# Altium PCB ftdi_pcb.PcbDoc
Units mil, origin at the board's own origin, x right, y up, seen from the top; angles counter-clockwise.
Board outline 1450 x 715 mil, 2 copper layers (Top Layer, Bottom Layer); 12 components, 10 nets, 50 pads, 19 vias.
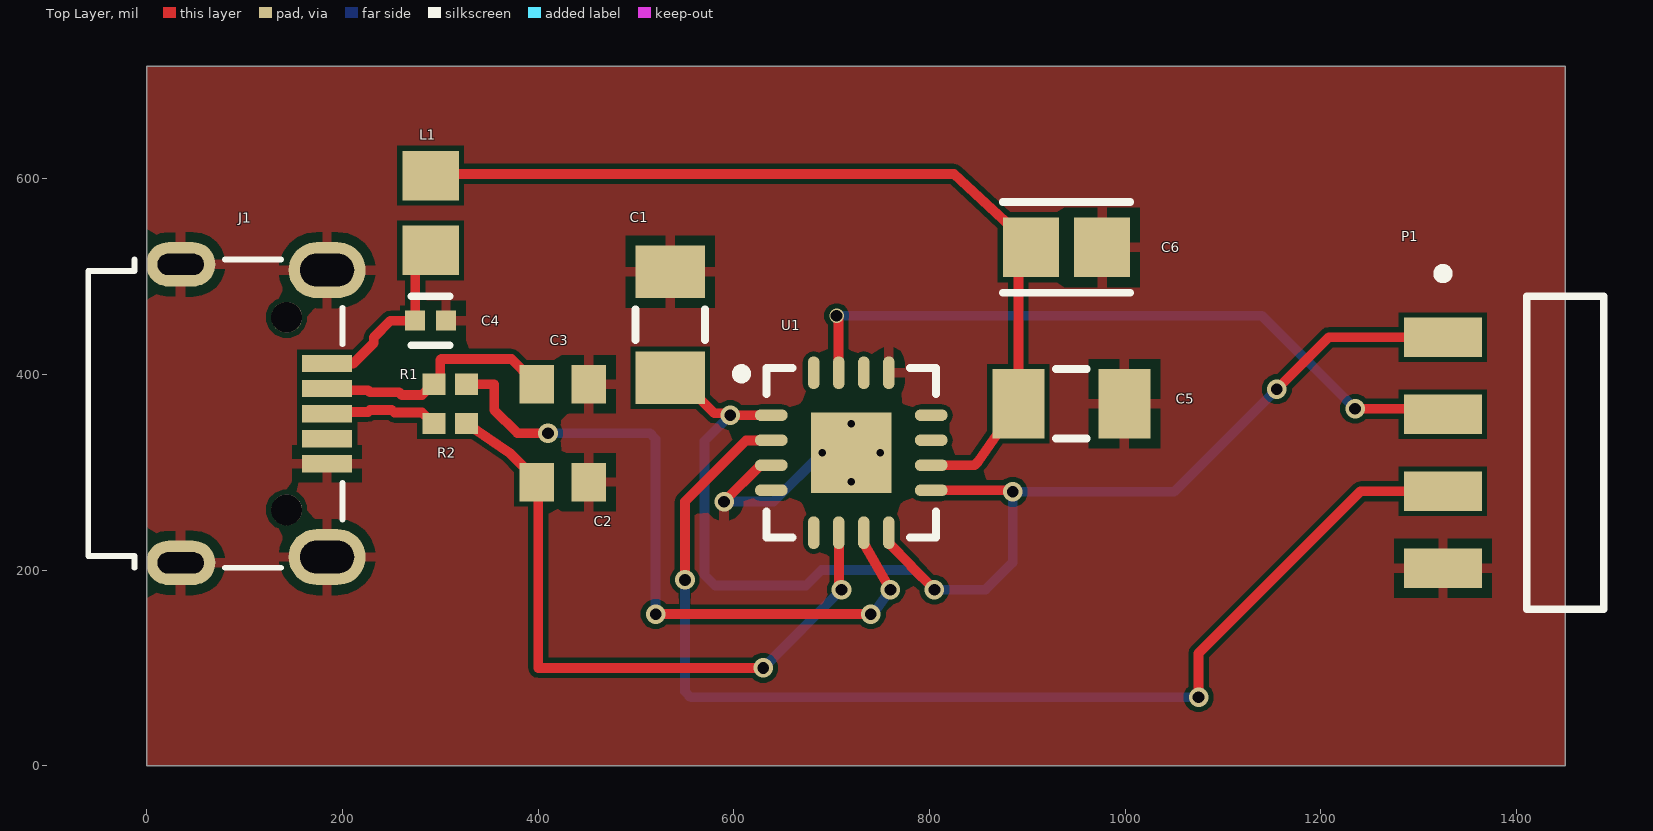
[diagram p0: Top Layer view]
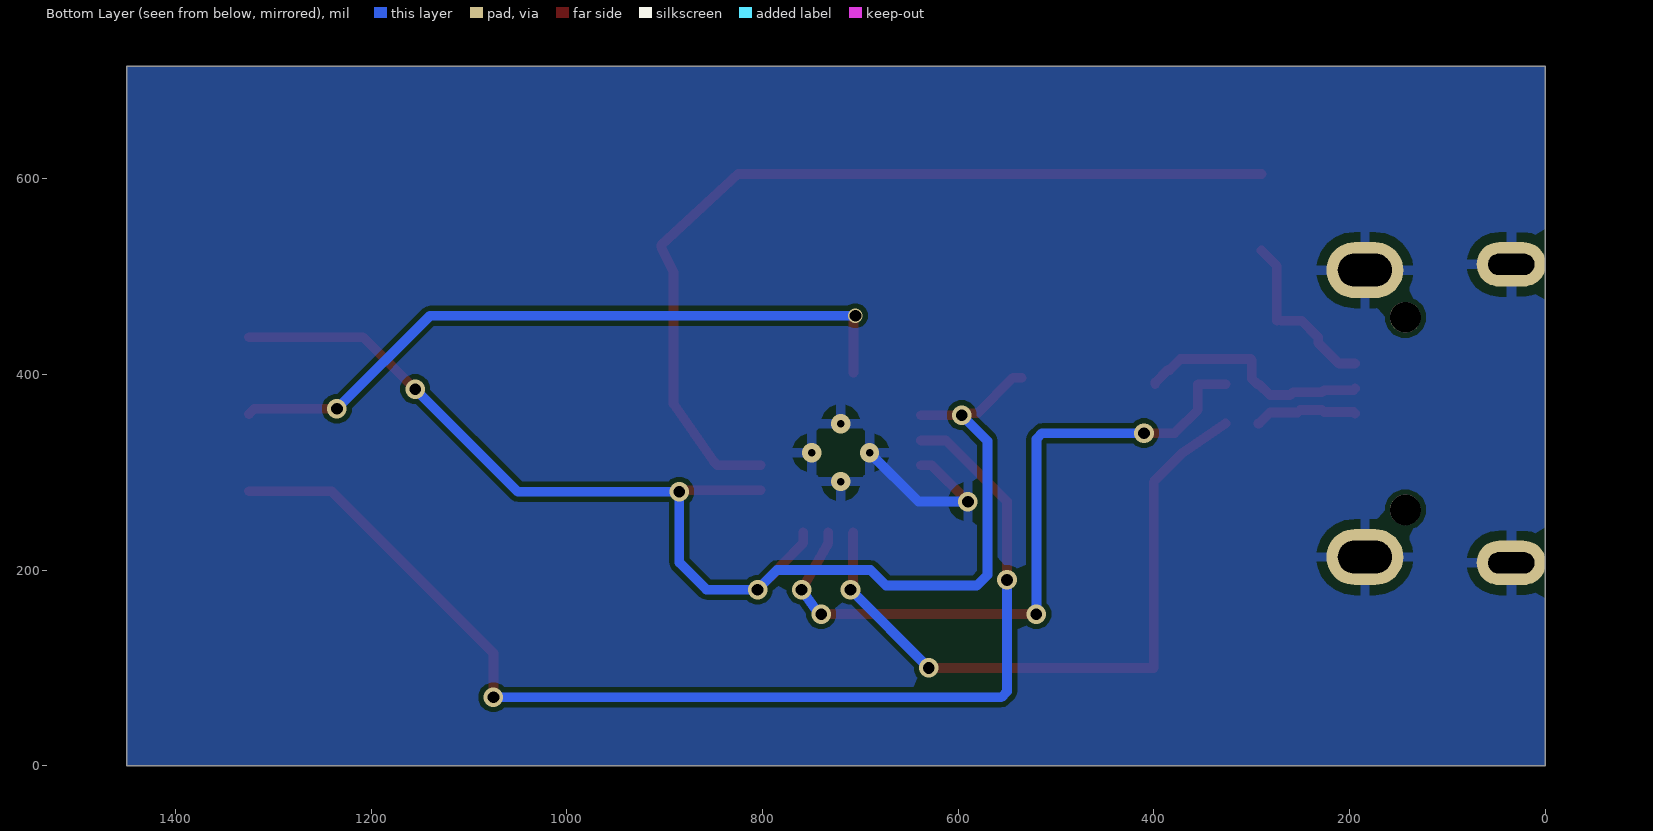
[diagram p1: Bottom Layer view, seen from below]
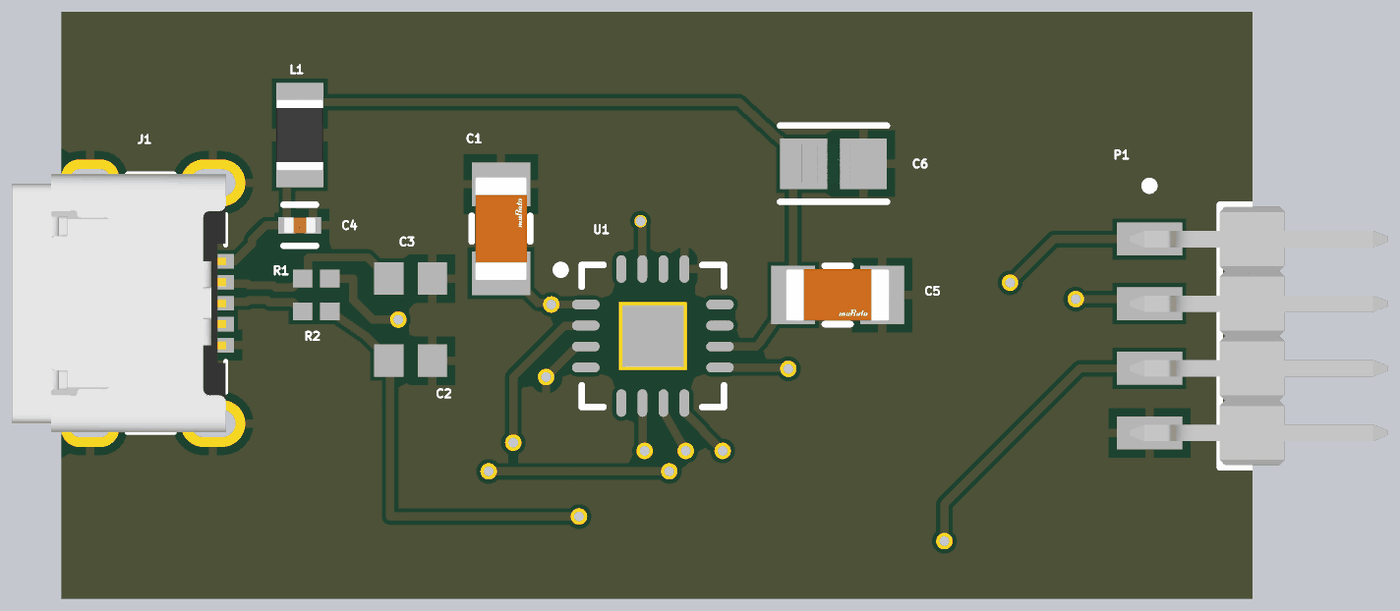
[diagram p2: 3D render of the assembled board from above, using the file's embedded part models]

## Layer stack, top to bottom
Top Solder: solder mask 0.4, Solder Resist, Dk 3.5
Top Layer: signal copper 1.4
Dielectric 1: dielectric 12.6, FR-4, Dk 4.8
Bottom Layer: signal copper 1.4
Bottom Solder: solder mask 0.4, Solder Resist, Dk 3.5

## Board outline
0,0 1450,0 1450,715 0,715

## Design rules (kind name [scope] priority, off if disabled: settings)
Clearance [All] p1: gap=5 ignorepadtopadclearanceinfootprint=FALSE
DiffPairsRouting [All] p1: maxlimit=10 minlimit=6 mostfreqgap=8 toplayer_minwidth=8 toplayer_maxwidth=10 toplayer_prefwidth=10 bottomlayer_minwidth=8 bottomlayer_maxwidth=10 bottomlayer_prefwidth=10 maxuncoupledlength=500
MinimumSolderMaskSliver [All] p1: minsoldermaskwidth=5
PolygonConnect [All] p1: connectstyle=Relief reliefconductorwidth=10 reliefentries=4 polygonreliefangle="90 Angle" airgapwidth=10
RoutingVias [All] p1: holewidth=28 width=50 viastyle="Through Hole" minholewidth=28 minwidth=50 maxholewidth=28 maxwidth=50
SilkToSilkClearance [All] p1: silktosilkclearance=5
SilkToSolderMaskClearance [IsPad] p1: minsilkscreentomaskgap=5 clearancetoexposedcopper=TRUE
SolderMaskExpansion [All] p1: expansion=0 istentingtop=FALSE
SupplyNets "Schematic Supply Nets_1" [InNet('GND')] p1: voltage=0.000
SupplyNets "Schematic Supply Nets" [InNet('VCC')] p2: voltage=0.000
Width [All] p1: maxlimit=10 minlimit=10 preferedwidth=10
26 further rules are at their usual default settings.

## Components (designator, comment, footprint, x,y, rotation, side; value= is the part's Value field where it differs from the comment)
C1 "100nF" FP-GRT31C-0_2-IPC_B 535,450.84 r90 top
C2 "47pF" CAPC1608X87X35NL15T15 425,290 r180 top
C3 "47pF" CAPC1608X87X35NL15T15 425,390 r180 top
C4 "10nF" FP-C0402-BB-MFG 290,455 r0 top value="10,000 pF"
C5 "100nF" FP-GRT31C-0_2-IPC_B 945,370 r0 top
C6 "4.7UF" FP-CL21-IPC_A 940,530 r0 top
J1 "629105150521" 629105150521 70,360 r270 top
L1 "MI0805K601R-10" LIRD-MI0805K601R-10-2_V 290,565 r90 top
P1 "MMT-104-01-T-SH" SMTC-MMT-104-01-X-SH 1450,320 r270 top
R1 "27R" RESC1005X40X25NL05T10 310,390 r0 top
R2 "27R" RESC1005X40X25NL05T10 310,350 r0 top
U1 "FT230XQ-T" QFN-16_M 720,320 r0 top

## Footprints (in the part's own frame and the unit in brackets; to place one, negate y for a bottom-side part, rotate by r counter-clockwise, add the part's x,y. Pads: shape width x height; smd on the part's side, far side on the other; paste and mask are expansions set on the pad)
629105150521 [mm] "Micro USB 2.0 SMT Type B Horizontal 5 Contacts High Current"
  rect 0.45x1.3 smd: 1(-1.3,2.9) 2(-0.65,2.9) 3(0,2.9) 4(0.65,2.9) 5(1.3,2.9)
  round 0.8 hole 0.8 unplated: MH1(-2.5,1.85) MH2(2.5,1.85)
  oval 1.15x1.8 hole 0.55 slot 1.2 at 90 deg: Shell(-3.875,-0.9) Shell(3.875,-0.9)
  oval 1.45x2 hole 0.85 slot 1.4 at 90 deg: Shell(-3.725,2.9) Shell(3.725,2.9)
  silkscreen extent -4,-3.3 4,3.3, body extent -4,-3.3 4,3.3, height 2.75
CAPC1608X87X35NL15T15 [mm] "Chip Capacitor, 2-Leads, Body 1.60x0.80mm, IPC Medium Density"
  rect 0.9x1 smd: 1(-0.675,0) 2(0.675,0)
  body extent -0.87,-0.48 0.87,0.47, height 0.87
FP-C0402-BB-MFG [mm]
  rect 0.52x0.52 smd paste+0 mask+0: 1(-0.4,0) 2(0.4,0)
  silkscreen extent -0.5,-0.64 0.5,0.64, body extent -0.8,-0.4 0.8,0.4, height 0.25
FP-CL21-IPC_A [mil]
  rect 57.27x61.27 smd paste+0 mask+0: 1(-36.45,0) 2(36.45,0)
  silkscreen extent -65,-46 65,46, body extent -85,-50 85,50, height 10
FP-GRT31C-0_2-IPC_B [mil]
  rect 53.33x71.11 smd paste+0 mask+0: 1(-54.16,0) 2(54.16,0)
  silkscreen extent -16,-36 16,36, body extent -91,-45 91,45, height 10
LIRD-MI0805K601R-10-2_V [mm] "Chip Bead, 2-Leads, Body 2.2 x1.45 mm"
  rect 1.285x1.47 smd: 1(-0.972,0) 2(0.972,0)
  body extent -1.1,-0.72 1.1,0.73, height 1.1
QFN-16_M [mm] "QFN, 16-Leads, Body 4x4mm, Pitch 0.65mm, Thermal Pad 2.1x2.1mm, IPC Low Density"
  oval 0.85x0.3 smd: 1(-2.075,0.975) 2(-2.075,0.325) 3(-2.075,-0.325) 4(-2.075,-0.975) 9(2.075,-0.975) 10(2.075,-0.325) 11(2.075,0.325) 12(2.075,0.975)
  oval 0.3x0.85 smd: 5(-0.975,-2.075) 6(-0.325,-2.075) 7(0.325,-2.075) 8(0.975,-2.075) 13(0.975,2.075) 14(0.325,2.075) 15(-0.325,2.075) 16(-0.975,2.075)
  rect 2.1x2.1 smd paste-1.05: 17(0,0)
  silkscreen extent -2.97,-2.2 2.2,2.2, body extent -2.05,-2.05 2.05,2.05, height 0.8
RESC1005X40X25NL05T10 [mm] "Chip Resistor, 2-Leads, Body 1.00x0.50mm, IPC Medium Density"
  rect 0.6x0.55 smd: 1(-0.425,0) 2(0.425,0)
  body extent -0.53,-0.27 0.53,0.28, height 0.4
SMTC-MMT-104-01-X-SH [mm] "Terminal Surface Mount Strip ASSEM, 1x4 Pins, Horizontal, 2mm Pitch, Male"
  rect 1.02x2.03 smd: 1(-3,-3.181) 2(-1,-3.181) 3(1,-3.181) 4(3,-3.181)
  silkscreen extent -4.77,-3.31 4.06,0.99, body extent -4,-3.8 4,4.19, height 1.92

## Part data
C1 C5: library part CMP-06035-026891-1, "Multi-Layer Ceramic Capacitor 100nF 25V C0G ±1% 1206 Emboss T/R"
C2 C3: library part CMP-2006-03500-1, "CAP CER 47PF 50V C0G/NP0 0603", Manufacturer=Kemet, Part Number=C0603X470J5GACTU
C4: library part CMP-03020-004015-1, "C0402 10 nF X7R 10.00% 16 V", Capacitance="10,000 pF", Manufacturer=Kemet, Manufacturer Part Number=C0402C103K4RAC, Package=C0402-BB, Temperature="-55°C to +125°C", Temperature Characteristic=X7R, Temperature Coefficient=15%, Temperature Range High=+125°C, Temperature Range Low=-55°C, Tolerance=0.1, Voltage Rating="16 V", Automotive=No, Category=Cap, ComponentLink2Description=Datasheet, ComponentLink2URL=https://content.kemet.com/datasheets/KEM_C1002_X7R_SMD.pdf, Device Class L1="Passive Components", Device Class L2=Capacitors, Device Class L3="Ceramic Capacitors", Height=0.55mm, Ipc Land Pattern Name=CAPC10050X50, Lead Free=Yes, Material=Ceramic, Mouser Description="Multilayer Ceramic Capacitors MLCC - SMD/SMT 16volts 0.01uF 10% X7R", Octopart=https://octopart.com/c0402c103k4rac-kemet-1325399, RoHS=TRUE
C6: library part CMP-13271-002852-1, "CL21 Series 0805 4.7uF 16V ±10% Tolerance X7R Multilayer Ceramic Chip Capacitor", Capacitance=4.7uF, Case Code (Imperial)=0805, Case Code (Metric)=2012, Max Operating Temperature=125°C, Min Operating Temperature=-55°C, Ratings=AEC-Q200, Tolerance=10%, Voltage Rating=16V, Case/Package=0805, Features="Soft Termination", Length=0.079inch, Mount="Surface Mount", Packaging="Tape and Reel", Thickness=0.037inch, Width=0.049inch
J1: library part CMP-1502-03252-4, "USB Connector, 5 Contact(s), Female, Right Angle, Surface Mount Terminal, Locking", Contact Resistance=30mΩ, Current Rating=3A, Insulation Resistance=1GΩ, Max Operating Temperature=85°C, Min Operating Temperature=-40°C, Operating Supply Voltage=30V, Connector Type=USB, Contact Material=Gold, Contact Plating=Gold, Features=Shielded, Gender=Receptacle, Height=2.86mm, Lead Free="Lead Free", Mount="Horizontal, Surface Mount", Number of Contacts=5, Number of Pins=5, Orientation=Horizontal, Packaging="Tape and Reel", REACH SVHC=Unknown, RoHS=Compliant, Termination=SMD/SMT, USB Standard="USB 2.0", Voltage Rating=30V
L1: library part CMP-2000-05196-1, "Chip Bead for Power Filtering, 1500 mA, 600 Ohm, -40 to 125 degC, 0805 (2012 Metric), RoHS, Tape and Reel", Current Rating (Max)=1.5A, DC Resistance (DCR) (Max)=100mOhm, Impedance @ Frequency=600Ohm@100MHz, Manufacturer=Laird, Operating Temperature=-40degC~125degC, Package / Case=0805(2012Metric), Package Description="2-Pin Surface Mount Device, Body 2 x 1.25 mm", Package Reference=MI0805K601R-10-2, Ratings=-, Standard Package=1, Catalog Drawings=(HI,HZ,LI,MI)0805Series_1.10mmMax.Height, Category=Filters, Datasheet URL=https://datasheet.ciiva.com/3082/mi0805k601r-10-a-vp-3082219.pdf, Datasheet Version="Rev. A, 01/2004", Family=FerriteBeadsandChips, Filter Type=PowerLine, Height (Max)="0.043\"(1.10mm)", Kits=240-2227-ND-KITEMIFERRITEBEADCHIPSMD, Manufacturer URL=https://www.lairdtech.com, Mounting Type=SurfaceMount, Number of Lines=1, Online Catalog=MISeries, Other Names=240-2390-1, Packaging=CutTape(CT), Series=MI, Size / Dimension="0.079\"Lx0.049\"W(2.00mmx1.25mm)"
P1: library part CMP-1029-00049-1, "Horizontal Surface Mount Header, -55 to 105 degC, 2 mm Pitch, 4-Pin, Male, RoHS", Manufacturer=Samtec, Temperature Range="-55 to 105 degC", ComponentLink1Description="Manufacturer URL", ComponentLink1URL=http://www.samtec.com, ComponentLink2Description=Datasheet, ComponentLink2URL=http://d2a072wq521u33.cloudfront.net/catalog_english//MMT_SM.PDF, ComponentLink3Description="Package Specification", ComponentLink3URL=http://www.samtec.com/documents/webfiles/cpdf/MMT-1XX-XX-XX-XX-XX-XXX-X-XX-MKT.pdf, DatasheetVersion=F-214, Mounting Technology="Surface Mount", Orientation=Horizontal, PackageDescription="2mm Horizontal Terminal Surface Mount Strip ASSEM", PackageReference=MMT-104-01-X-SH, PackageVersion="CY, 12/2000", PartNumber=MMT-104-01-T-SH, Pitch="2 mm", RoHS=True
R1 R2: library part CMP-2002-08077-1, "27 Ohms ±5% 0.063W, 1/16W Chip Resistor 0402 (1005 Metric) Moisture Resistant Thick Film", Manufacturer=Yageo, Part Number=RC0402JR-1327RL
U1: library part CMP-0248-00009-2, "USB to Basic UART Interface Chip, UHCI/OHCI/EHCI Compatible, USB 2.0 Compatible, -40 to +85 degC, 16-Pin QFN, Pb-Free, Tray", Manufacturer=FTDI, Code_JEDEC=MO-220WGGC, ComponentLink1Description="Manufacturer URL", ComponentLink1URL=http://www.ftdichip.com/, ComponentLink2Description=Datasheet, ComponentLink2URL=http://www.ftdichip.com/Support/Documents/DataSheets/ICs/DS_FT230X.pdf, ComponentLink3Description="FT230X Product Page", ComponentLink3URL=www.ftdichip.com/Products/ICs/FT230X.html, DatasheetVersion="ver 1.2, Feb-2013", PackageDescription="16-Pin Quad Flat No-Lead, 4x4 mm Body, 0.65 mm Pitch", PackageReference=QFN-16, PackageVersion=Feb-13, PartNumber=FT230XQ-T, RevisionNote="DatasheetVersion updated to 1.2 Feb-2013"

## Via types
v1: diameter 20, hole 12, Top Layer to Bottom Layer, 14 vias
v2: diameter 19.68, hole 7.87, Top Layer to Bottom Layer, 4 vias
v3: diameter 15, hole 12, Top Layer to Bottom Layer, 1 vias

## Nets (pads, with @x,y where several pads share a name; then routed paths per layer and width w, separated by ;. In a path a pad name is that pad's centre, name@x,y a point inside that pad or via, vN(x,y) a via of type N, cw(c..) or ccw(c..) an arc to the next point about the centre after c; other vN are vias at no path point)
GND: C1.2 C2.1 C3.1 C4.2 C5.2 C6.2 J1.5 J1.Shell P1.4 U1.3 U1.13 U1.17 | length 185
  Top Layer w10: J1.Shell@194.17,213.35 J1.Shell@194.21,213.31 ; v1(590,270) 627.2,307.2 U1.3
  Bottom Layer w10: v1(590,270) 640.47,270 v2(690.47,320)
  other v2: 720,290.47 749.52,320 720,349.52
NetC1_1: C1.1 P1.1 U1.1 U1.8 U1.9 | length 1378.6
  Top Layer w10: C1.1 543.89,396.67 580.26,360.3 594.43,360.3 v1(596.34,358.39) U1.1 ; U1.8 758.39,227.48 781.05,204.82 781.05,203.95 v1(805,180) ; U1.9 882.03,281.61 883.65,280 v1(885,280) ; v1(1155,385) 1208.11,438.11 P1.1
  Bottom Layer w10: v1(596.34,358.39) 570,332.05 570,195 580.86,184.14 673.65,184.14 689.5,200 785,200 v1(805,180) 857.17,180 885,207.83 v1(885,280) ; v1@884.82,279.82 v1(885,280) ; v1(1155,385) 1050,280 v1(885,280)
NetC2_2: C2.2 R2.2 U1.6 | length 687.8
  Top Layer w10: R2.2 370.39,320 400,290.39 400,100 v1(630,100) ; U1.6 707.55,237.96 707.55,182.45 v1(710,180)
  Bottom Layer w10: v1(630,100) v1(710,180)
NetC3_2: C3.2 J1.2 R1.1 | length 245.3
  Top Layer w10: J1.2@194.17,385.59 195.91,383.86 225.98,383.86 228.04,381.8 257.62,381.8 260.42,379 281.28,379 292.28,390 294.09,390 299.92,395.83 299.92,414.89 300.86,415.83 372.6,415.83 383.74,404.69 385.71,404.69 398.43,391.97 C3.2
NetC4_1: C4.1 J1.1 L1.1 | length 175.6
  Top Layer w10: J1.1@194.17,411.18 210.91,411.18 231.89,432.17 231.89,437.87 249.02,455 C4.1@270,455 ; C4.1 274.25,510.96 L1.1
NetJ1_3: J1.3 R2.1 | length 106.4
  Top Layer w10: J1.3@194.17,360 195.91,361.73 225.98,361.73 228.04,363.8 250.17,363.8 252.96,361 281.28,361 292.28,350 R2.1
NetP1_2: P1.2 U1.15 | length 720.7
  Top Layer w10: v3(705,460) 706.86,458.14 706.86,402.04 U1.15 ; v1(1235,365) 1319.15,365 P1.2
  Bottom Layer w10: v3(705,460) 1140,460 v1(1235,365)
NetP1_3: P1.3 U1.2 | length 1199.3
  Top Layer w10: v1(550,190) 550,270 612.45,332.45 637.96,332.45 U1.2 ; v1(1075,70) 1075,115 1240.63,280.63 P1.3
  Bottom Layer w10: v1(550,190) 550,75.86 555.86,70 v1(1075,70)
NetR1_2: R1.2 U1.7 | length 726.9
  Top Layer w10: R1.2 355,390 355,363.68 378.68,340 v1(410,340) ; v1(520,155) v1(740,155) ; U1.7 732.8,227.48 v1(760,180)
  Bottom Layer w10: v1(410,340) 514.14,340 520,334.14 v1(520,155) ; v1@743.53,158.09 746.39,160.94 v1(760,180) v1@761.7,182.37
VCC: C5.1 C6.1 L1.2 U1.10 | length 928.7
  Top Layer w10: L1.2@290,605 825,605 903.55,532 C6.1 890.84,504.37 C5.1 869.47,339.44 849.41,310.75 845.86,307.2 U1.10
pads on no net: J1.4 J1.MH1 J1.MH2 U1.4 U1.5 U1.11 U1.12 U1.14 U1.16

## Polygon pours and split planes (outlines as drawn)
GND on Bottom Layer "GND_L02_P001" (solid, remove dead copper, pour order 1): 0,0 1450,0 1450,715 0,715
GND on Top Layer "GND_L01_P000" (solid, remove dead copper, pour order 0): 0,0 0,715 1450,715 1450,0

## Text inside footprints (layer, text, board x,y; h text height)
J1: Assembly Notes "PCB Edge" at -59.92,411.18 h16 r270